# Altium PCB max6675.PcbDoc
Units mm, origin at the board's own origin, x right, y up, seen from the top; angles counter-clockwise.
Board outline 12.7 x 24 mm, 2 copper layers (Top Layer, Bottom Layer); 3 components, 0 nets, 17 pads, 0 vias.
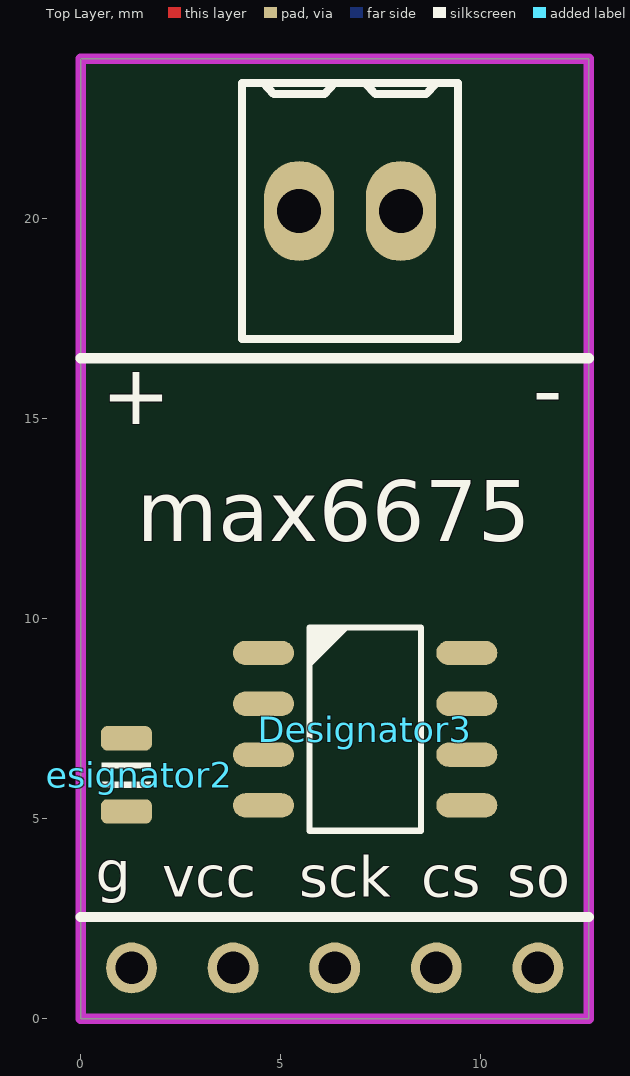
[diagram p0: Top Layer view]
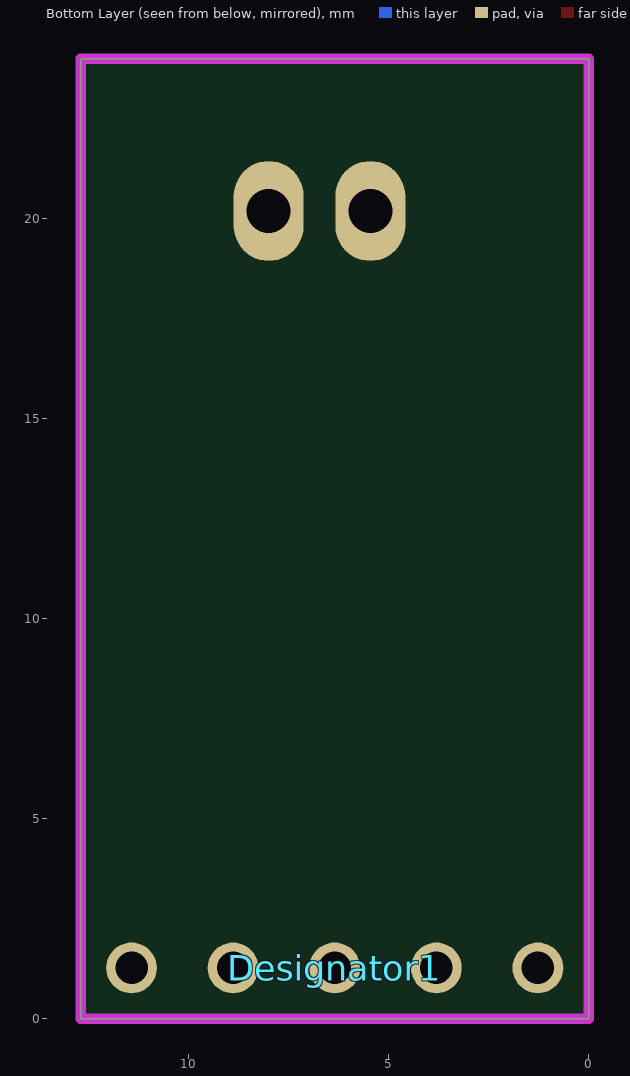
[diagram p1: Bottom Layer view, seen from below]

## Layer stack, top to bottom
Top Solder: solder mask 0.0102, Solder Resist, Dk 3.5
Top Layer: signal copper 0.0356
Dielectric 1: dielectric 0.32, FR-4, Dk 4.8
Bottom Layer: signal copper 0.0356
Bottom Solder: solder mask 0.0102, Solder Resist, Dk 3.5

## Board outline
0,0 12.7,0 12.7,24 0,24

## Design rules (kind name [scope] priority, off if disabled: settings)
Clearance [All] p1: gap=0.254 ignorepadtopadclearanceinfootprint=FALSE except(0: Arc-Hole Track-Hole SMDPad-Hole THPad-Hole Via-Hole Fill-Hole Poly-Hole Region-Hole Text-Hole)
PolygonConnect [All] p1: connectstyle=Relief reliefconductorwidth=0.254 reliefentries=4 polygonreliefangle="90 Angle" airgapwidth=0.254
RoutingVias [All] p1: holewidth=0.711 width=1.27 viastyle="Through Hole" minholewidth=0.711 minwidth=1.27 maxholewidth=0.711 maxwidth=1.27
SolderMaskExpansion [All] p1: expansion=0.102
Width [All] p1: maxlimit=0.254 minlimit=0.254 preferedwidth=0.254
30 further rules are at their usual default settings.

## Components (designator, comment, footprint, x,y, rotation, side; value= is the part's Value field where it differs from the comment)
Designator1 "g" HDR1X5_2.54_180 11.43,1.27 r90 bottom
Designator2 "Comment" CAP_0805 1.143,6.096 r90 top
Designator3 "Comment" _SOP_E150_8 7.112,7.239 r0 top

## Footprints (in the part's own frame and the unit in brackets; to place one, negate y for a bottom-side part, rotate by r counter-clockwise, add the part's x,y. Pads: shape width x height; smd on the part's side, far side on the other; paste and mask are expansions set on the pad)
_SOP_E150_8 [mil]
  oval 60x24 smd: 1(-100,75) 2(-100,25) 3(-100,-25) 4(-100,-75) 5(100,-75) 6(100,-25) 7(100,25) 8(100,75)
  silkscreen extent -55,-100 55,100, body extent -118,-96 118,96, height 69
CAP_0805 [mil]
  rrect50% 24x50 smd: 1(-36,0) 2(36,0)
  silkscreen extent -12,-24 12,24, body extent -43,-25 43,25, height 52
HDR1X5_2.54_180 [mil]
  round 50 hole 32: 1(0,0) 2(0,-100) 3(0,-200) 4(0,-300) 5(0,-400)
  body extent -49,-450 49,50, height 323

## Free pads (board coordinates)
  oval 1.75x2.5 hole 1.1: 1(5.461,20.193) 2(8.001,20.193)

## Nets (pads, with @x,y where several pads share a name; then routed paths per layer and width w, separated by ;. In a path a pad name is that pad's centre, name@x,y a point inside that pad or via, vN(x,y) a via of type N, cw(c..) or ccw(c..) an arc to the next point about the centre after c; other vN are vias at no path point)
pads on no net: Designator1.1 Designator1.2 Designator1.3 Designator1.4 Designator1.5 Designator2.1 Designator2.2 Designator3.1 Designator3.2 Designator3.3 Designator3.4 Designator3.5 Designator3.6 Designator3.7 Designator3.8

## Keep-outs
Keep-Out Layer:
  the board outline again, w0.254

## Silkscreen, mask and mechanical layers (free items; w line width, h text height)
Top Overlay:
  lines w0.2: 4.572,23.393 4.826,23.114 6.096,23.114 6.35,23.393 ; 7.112,23.393 7.366,23.114 8.636,23.114 8.89,23.393 ; 4.031,16.993 4.031,23.393 9.431,23.393 9.431,16.993 4.131,16.993 4.031,16.993
  lines w0.254: 0,2.54 12.7,2.54 ; 0,16.51 12.7,16.51
  text "-" at 11.303,14.986 h1.52
  text "+" at 0.508,14.859 h1.52
  text "max6675" at 1.397,11.938 h1.52
  text "vcc" at 2.032,3.048 h1.02
  text "sck" at 5.461,3.048 h1.02
  text "cs" at 8.509,3.048 h1.02
  text "so" at 10.668,3.048 h1.02
Mechanical 13:
  lines w0.2: 3.961,16.943 9.501,16.943 9.501,23.443 3.961,23.443 3.961,16.943
Mechanical 14:
  lines w0.051: 3.404,16.535 9.931,16.535 9.931,23.901 3.404,23.901 3.404,16.535
Mechanical 19:
  lines w0.2: 6.231,20.193 7.231,20.193 ; 6.731,19.693 6.731,20.693 ; 3.431,16.493 3.431,16.893 3.431,23.893 9.931,23.893 9.931,17.293 9.931,16.493 3.431,16.493